# EAGLE board untitled (EAGLE 8.2.2)
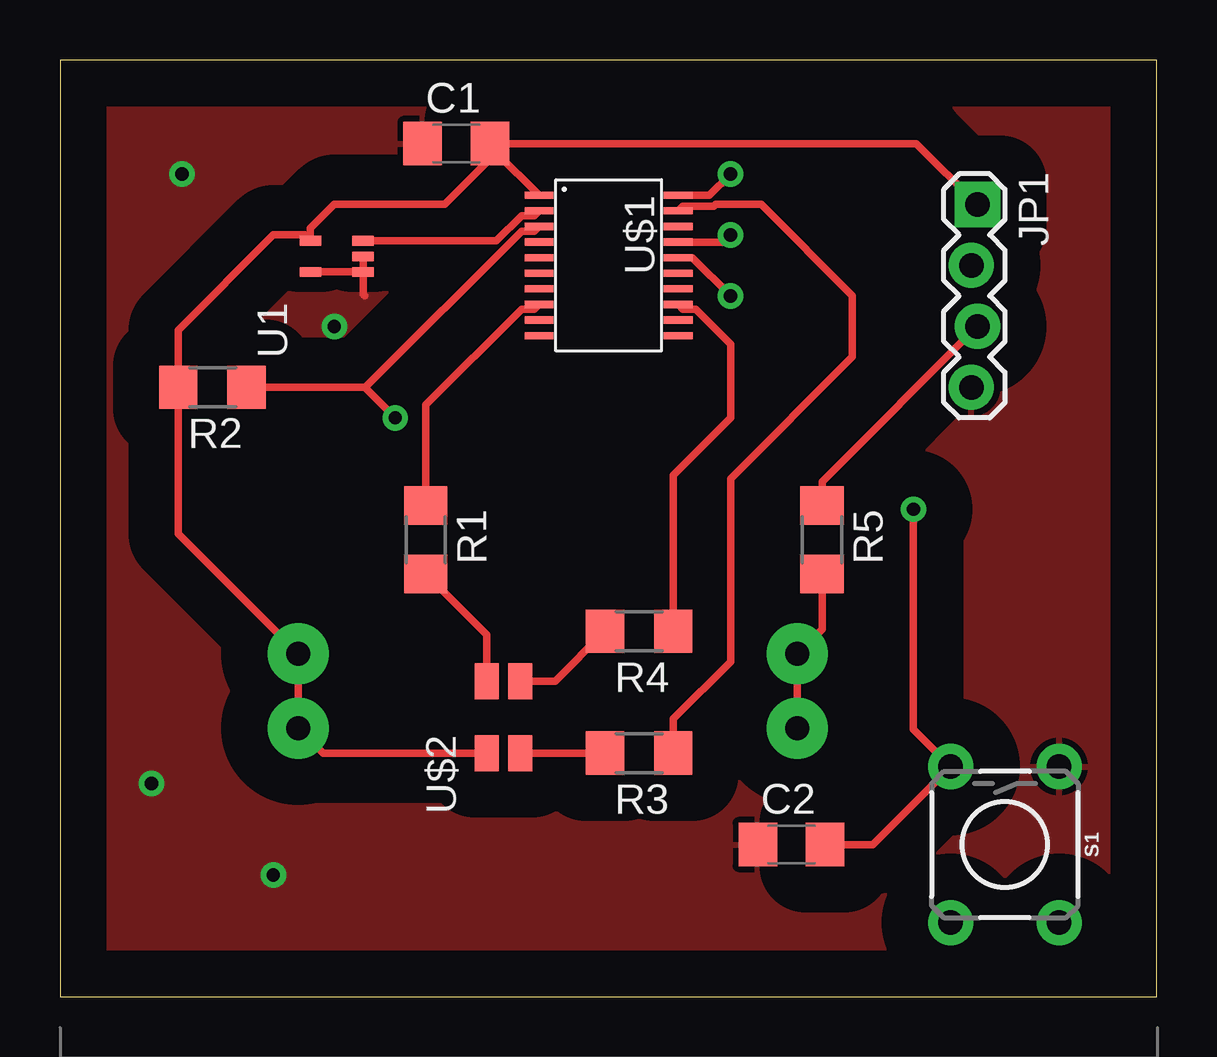
[diagram p0: board, top side]
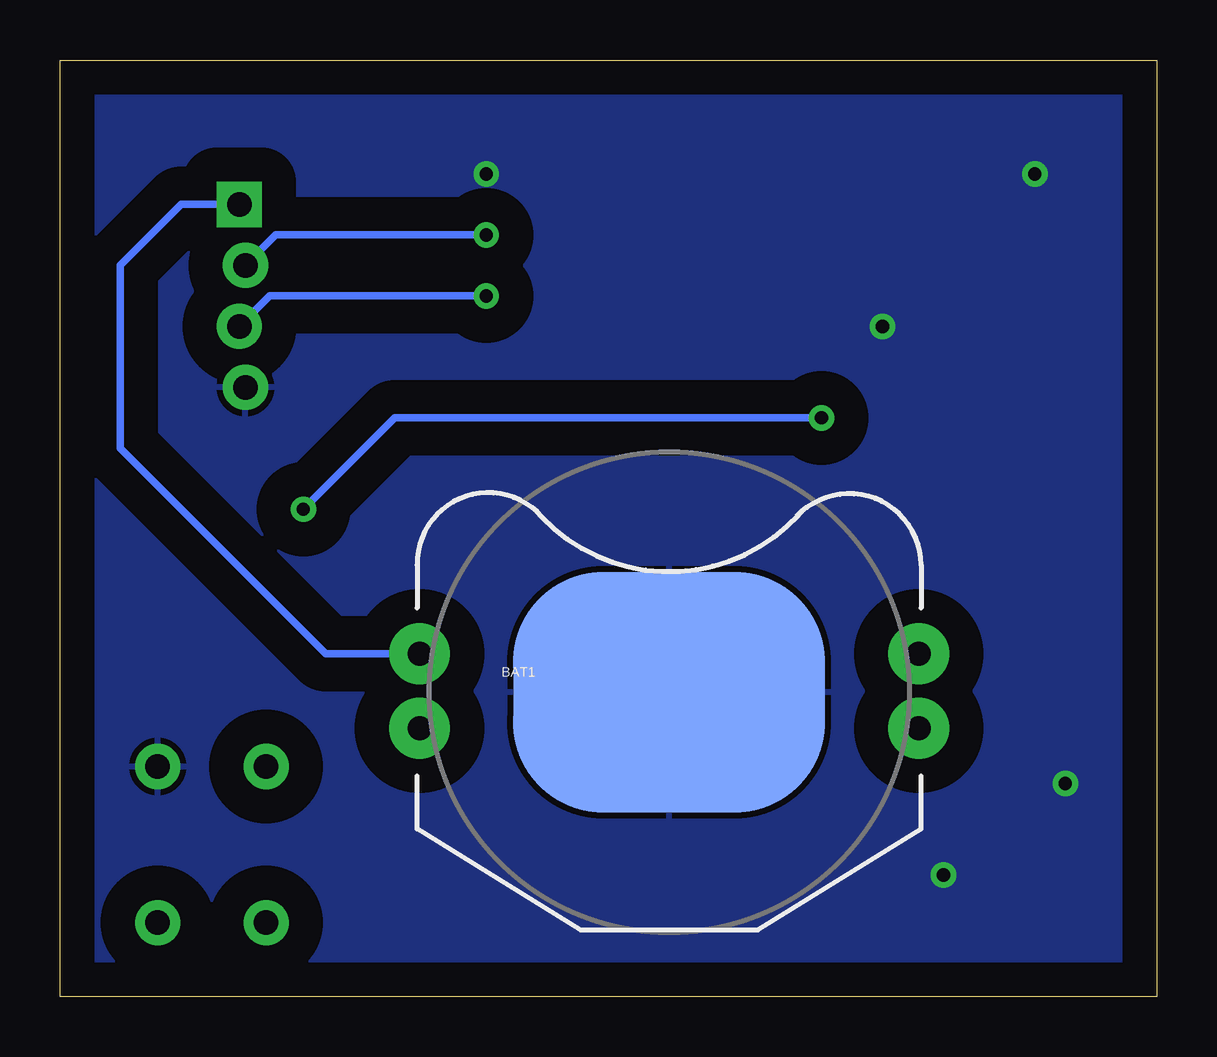
[diagram p1: board, bottom side, seen from below]

Size 45.7 x 39.04 mm. Coordinates in mm from the lower left corner, seen from the top.
Outline: 0,0 45.7,0 45.7,39.04 0,39.04 0,0
Copper layers (1*16): Top 0.035mm / dielectric 1.5mm / Bottom 0.035mm
Design rules "AdvancedCircuitsBarebones": minimum track width 6mil, minimum drill 20mil, track to track 6mil, track to pad 6mil, pad to pad 6mil, via to via 6mil, smd to smd 6mil, copper to edge 10mil, drill to drill 6mil, minimum pad ring 12mil, minimum via ring 10mil, stop-mask expansion 4mil, vias tented up to drill 25mil, thermal gap 10mil

## Footprints (pad centres in the part's own frame; a part is rotated, then mirrored left to right if it is on the bottom)
BATTCON_20MM_PTH_COMPACT = drill 1 pad 2.54: 1 -10.4,1.6; 3 10.4,1.6; 4 10.4,-1.5; 5 -10.4,-1.5 | smd 13 x 10: 2 0,0
C1206 = smd 1.6 x 1.8: 1 -1.4,0; 2 1.4,0
1X04_LOCK = drill 1.016 pad 1.88 square: 1 0,0.127 | drill 1.016 pad 1.88: 2 2.54,-0.127; 3 5.08,0.127; 4 7.62,-0.127
R1206 = smd 1.6 x 1.803: 1 -1.422,0; 2 1.422,0
TACTILE_SWITCH_PTH_6.0MM = drill 1.016 pad 1.88: 1 -3.251,2.261; 2 3.251,2.261; 3 -3.251,-2.261; 4 3.251,-2.261
SOT_563 = smd 0.4 x 0.9: GND 1,1; NC1 1,-1.2; NC2 1.65,-1.2; V+ 2.3,1; VOUT 2.3,-1.2
PW20 = smd 0.3 x 1.2: 1 -2.925,-2.9; 2 -2.275,-2.9; 3 -1.625,-2.9; 4 -0.975,-2.9; 5 -0.325,-2.9; 6 0.325,-2.9; 7 0.975,-2.9; 8 1.625,-2.9; 9 2.275,-2.9; 10 2.925,-2.9; 11 2.925,2.9; 12 2.275,2.9; 13 1.625,2.9; 14 0.975,2.9; 15 0.325,2.9; 16 -0.325,2.9; 17 -0.975,2.9; 18 -1.625,2.9; 19 -2.275,2.9; 20 -2.925,2.9
1210RGB = smd 1.5 x 1: P$1 0,0; P$2 3,0; P$3 0,-1.4; P$4 3,-1.4

## Placement (x,y rotation side)
BAT1  20mm coincell  [BATTCON_20MM_PTH_COMPACT]  20.32,12.7 0 bottom
C1  10uF  [C1206]  16.51,35.56 0 top
C2  470nF  [C1206]  30.48,6.35 0 top
JP1  [1X04_LOCK]  38.1,33.02 270 top
R1  10ohm  [R1206]  15.24,19.05 270 top
R2  47Kohm  [R1206]  6.35,25.4 180 top
R3  200ohm  [R1206]  24.13,10.16 180 top
R4  10ohm  [R1206]  24.13,15.24 180 top
R5  47Kohm  [R1206]  31.75,19.05 270 top
S1  MOMENTARY-SWITCH-SPST-PTH-6.0MM  [TACTILE_SWITCH_PTH_6.0MM]  39.37,6.35 270 top
U1  TEMPERATURE_SENSOR  [SOT_563]  11.43,29.21 90 top
U$1  MSP430G2XX3TSSOP  [PW20]  22.86,30.48 270 top
U$2  RGB_LED  [1210RGB]  17.78,10.16 90 top

## Library data of the parts
BAT1 = Battery
C1 R1-R5 = resistor
C2 = rcl
JP1 = Pendant
S1 = SparkFun-Switches; PROD_ID: SWCH-08441; SF_SKU: COM-00097
U1 U$1 U$2 = ELEC327

## Nets
GND: BAT1.2 C1.1 C2.1 JP1.4 S1.1 U1.GND U1.NC1 U1.NC2 U$1.20
N$1: U1.VOUT U$1.2
N$2: R4.2 U$2.P$4
N$3: R1.2 U$2.P$2
N$4: R3.2 U$2.P$3
N$5: R4.1 U$1.13
N$6: R3.1 U$1.19
N$7: R1.1 U$1.8
P1.1: C2.2 R2.1 S1.3 U$1.3
RST: JP1.3 R5.1 U$1.16
TEST: JP1.2 U$1.17
VCC: BAT1.1 BAT1.3 BAT1.4 BAT1.5 C1.2 JP1.1 R2.2 R5.2 U1.V+ U$1.1 U$2.P$1

## Tracks (layer width: path | path; a pad name or v marks a point on that pad's centre or on a via)
GND  (via drill 0.55)
  Top 0.305: U1.NC2 U1.NC1 | U1.GND U1.NC1 | U1.NC1 12.63,29.28 12.7,29.21 | U$1.20 27.05,33.41 v27.94,34.29
  other vias: 11.43,27.94 3.81,8.89 8.89,5.08 5.08,34.29
  pour Top (isolate 1.93): 0,0 0,39.37 45.72,39.37 45.72,0
  pour Bottom (isolate 1.422): 0,0 0,39.37 45.72,39.37 45.72,0
N$1
  Top 0.305: U$1.2 19.77,32.56 19.23,32.56 18.18,31.51 U1.VOUT
N$2
  Top 0.305: U$2.P$4 20.63,13.16 R4.2
N$3
  Top 0.305: U$2.P$2 17.78,15.09 R1.2
N$4
  Top 0.305: U$2.P$3 R3.2
N$5
  Top 0.305: U$1.13 25.96,28.66 26.49,28.66 27.94,27.21 27.94,24.13 25.55,21.74 R4.1
N$6
  Top 0.305: U$1.19 25.95,32.95 27.24,32.95 27.32,33.02 29.21,33.02 33.02,29.21 33.02,26.67 27.94,21.59 27.94,13.97 25.55,11.58 R3.1
N$7
  Top 0.305: U$1.8 19.77,28.66 19.23,28.66 15.24,24.67 R1.1
P1.1  (via drill 0.55)
  Top 0.305: C2.2 33.86,6.35 S1.3 35.56,11.15 v35.56,20.32 | U$1.3 19.77,31.91 19.23,31.91 12.72,25.4 | R2.1 12.72,25.4 | 12.72,25.4 12.72,25.38 v13.97,24.13
  Bottom 0.305: v13.97,24.13 31.75,24.13 v35.56,20.32
RST  (via drill 0.55)
  Top 0.305: U$1.16 26.35,30.8 v27.94,29.21 | R5.1 31.75,21.46 JP1.3
  Bottom 0.305: v27.94,29.21 36.96,29.21 JP1.3
TEST  (via drill 0.55)
  Top 0.305: U$1.17 27.64,31.45 v27.94,31.75
  Bottom 0.305: JP1.2 36.7,31.75 v27.94,31.75
VCC
  Top 0.305: BAT1.5 BAT1.1 31.75,15.33 R5.2 | 18.19,35.18 17.91,35.45 C1.2 35.69,35.56 JP1.1 | 18.19,35.18 U$1.1 | U$2.P$1 10.96,10.16 BAT1.4 BAT1.3 4.93,19.29 R2.2 4.93,27.79 8.89,31.75 10.19,31.75 U1.V+ 10.43,32.02 11.43,33.02 16.03,33.02 18.19,35.18
  Bottom 0.305: BAT1.1 34.62,14.3 43.18,22.86 43.18,30.48 40.64,33.02 JP1.1